# Altium PCB LED.PcbDoc
Units mm, origin at the board's own origin, x right, y up, seen from the top; angles counter-clockwise.
Board outline 15.13 x 12.6 mm, 2 copper layers (Top Layer, Bottom Layer), stack 1.671 mm thick; 5 components, 4 nets, 10 pads, 0 vias.
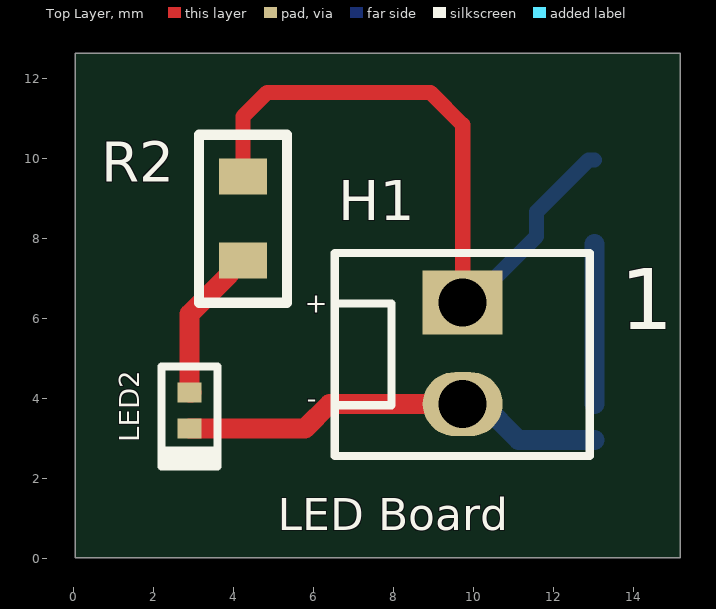
[diagram p0: Top Layer view]
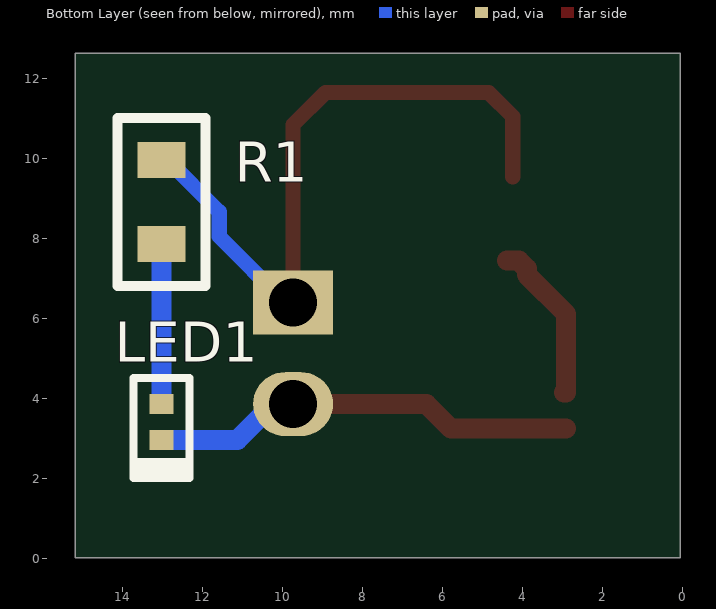
[diagram p1: Bottom Layer view, seen from below]
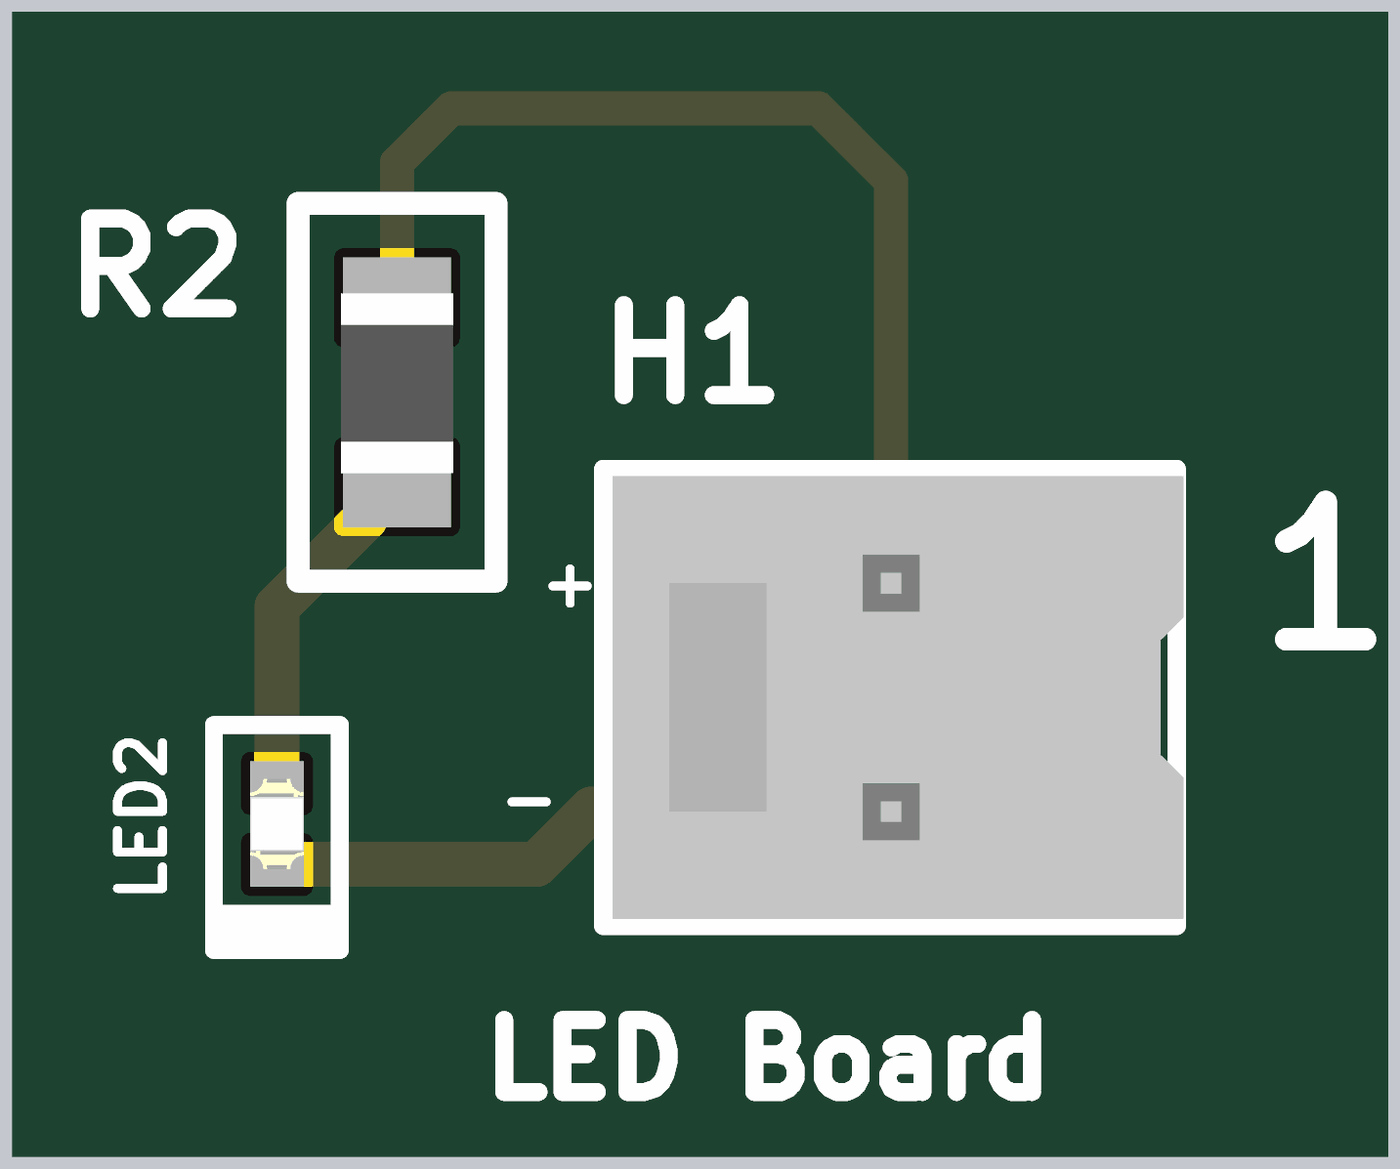
[diagram p2: 3D render of the assembled board from above, using the file's embedded part models]

## Layer stack, top to bottom
Top Solder: solder mask 0.0102, Solder Resist, Dk 3.5
Top Layer: signal copper 0.0356
Dielectric 1: dielectric 1.6, FR-4, Dk 4.8
Bottom Layer: signal copper 0.0356
Bottom Solder: solder mask 0.0102, Solder Resist, Dk 3.5

## Board outline
0.048,0.017 15.174,0.017 15.174,12.622 0.048,12.622

## Design rules (kind name [scope] priority, off if disabled: settings)
Clearance [All] p1: gap=0.3 ignorepadtopadclearanceinfootprint=FALSE
MinimumSolderMaskSliver [All] p1: minsoldermaskwidth=0.197
PolygonConnect [All] p1: connectstyle=Direct reliefconductorwidth=0.254 reliefentries=4 polygonreliefangle="90 Angle" airgapwidth=0.254
RoutingVias [All] p1: holewidth=0.3 width=0.6 viastyle="Through Hole" minholewidth=0.3 minwidth=0.6 maxholewidth=0.3 maxwidth=0.6
SilkToSilkClearance [All] p1: silktosilkclearance=0.173
SilkToSolderMaskClearance [IsPad] p1: minsilkscreentomaskgap=0.1 clearancetoexposedcopper=TRUE
SolderMaskExpansion [All] p1: expansion=0.102 istentingtop=FALSE
SupplyNets "Schematic Supply Nets_1" [InNet('3.3V')] p1: voltage=0.000
SupplyNets "Schematic Supply Nets" [InNet('GND')] p2: voltage=0.000
Width [All] p1: maxlimit=1 minlimit=0.3 preferedwidth=0.5
27 further rules are at their usual default settings.

## Components (designator, comment, footprint, x,y, rotation, side; value= is the part's Value field where it differs from the comment)
H1 "Connector Header Through Hole 2 position" "Header 1x2" 9.731,5.096 r0 top (schematic designator "header 1x2")
LED1 "LED red" LED-RED 13.025,3.408 r90 bottom
LED2 "LED red" LED-RED 2.905,3.69 r90 top
R1 "360" "R0805 - duplicate" 13.025,8.908 r90 bottom
R2 "360" "R0805 - duplicate" 4.24,8.49 r90 top

## Footprints (in the part's own frame and the unit in brackets; to place one, negate y for a bottom-side part, rotate by r counter-clockwise, add the part's x,y. Pads: shape width x height; smd on the part's side, far side on the other; paste and mask are expansions set on the pad)
"Header 1x2" [mm]
  rect 2x1.6 hole 1.2: 1(0,1.3)
  oval 2x1.6 hole 1.2: 2(0,-1.24)
  silkscreen extent -3.2,-2.54 3.17,2.54, body extent -3.1,-2.46 3.25,2.46, height 10.68
LED-RED [mm] "Red 621nm LED Indication - Discrete 1.8V 0402 (1006 Metric)"
  rect 0.5x0.6 smd: 1(-0.45,0) 2(0.45,0)
  silkscreen extent -1.4,-0.7 1.1,0.72, body extent -0.5,-0.3 0.5,0.3, height 0.26
"R0805 - duplicate" [mm]
  rect 0.9x1.2 smd: 1(-1.05,0) 2(1.05,0)
  silkscreen extent -2.1,-1.1 2.1,1.1, body extent -0.9,-0.63 1.1,0.63, height 0.61

## Part data
H1: library part "Header  Hole 2"
LED1 LED2: "Red 617nm LED Indication - Discrete 1.9V Radial"
R1 R2: library part Resistor, "AC0805FR-07360RL"

## Nets (pads, with @x,y where several pads share a name; then routed paths per layer and width w, separated by ;. In a path a pad name is that pad's centre, name@x,y a point inside that pad or via, vN(x,y) a via of type N, cw(c..) or ccw(c..) an arc to the next point about the centre after c; other vN are vias at no path point)
3.3V: H1.1 R1.2 R2.2 | length 17.2
  Top Layer w0.381: R2.2 4.24,11.043 4.843,11.646 8.923,11.646 9.731,10.838 H1.1
  Bottom Layer w0.381: H1.1 9.931,6.396 11.578,8.043 11.578,8.662 12.875,9.958 R1.2
GND: H1.2 LED1.1 LED2.1 | length 10.7
  Top Layer w0.5: LED2.1 5.786,3.24 6.402,3.856 H1.2
  Bottom Layer w0.5: H1.2 10.229,3.856 11.127,2.958 LED1.1
NetLED1_2: LED1.2 R1.1 | length 4
  Bottom Layer w0.5: LED1.2 R1.1
NetLED2_2: LED2.2 R2.1 | length 4
  Top Layer w0.5: LED2.2@2.955,4.14 LED2.2 2.905,6.105 R2.1@3.89,7.09 ; R2.1@3.89,7.24 4.09,7.44 R2.1 R2.1@4.39,7.44

## Silkscreen, mask and mechanical layers (free items; w line width, h text height)
Top Overlay:
  text "+" at 5.788,6.14 h0.5
  text "-" at 6.083,4.131 h0.5 r180
  text "LED Board" at 5.109,0.7 h0.8
Board:
  lines w0.2: 0.063,0.091 15.16,0.091 15.087,0.163 15.087,12.608 15.072,12.623 0.063,12.623 0.063,0.091 ; 0.063,0.091 0.063,0.091

## Text inside footprints (layer, text, board x,y; h text height)
H1: Top Overlay "1" at 13.668,5.731 h1.52